# Altium PCB BAZ-NUMDISPLAY-01R03.PcbDoc (part 2 of 2)
Units mil, origin at the board's own origin, x right, y up, seen from the top; angles counter-clockwise.
Board outline 16512.45 x 6376.95 mil, 2 copper layers (Top Layer, Bottom Layer); 219 components, 209 nets, 584 pads, 78 vias.
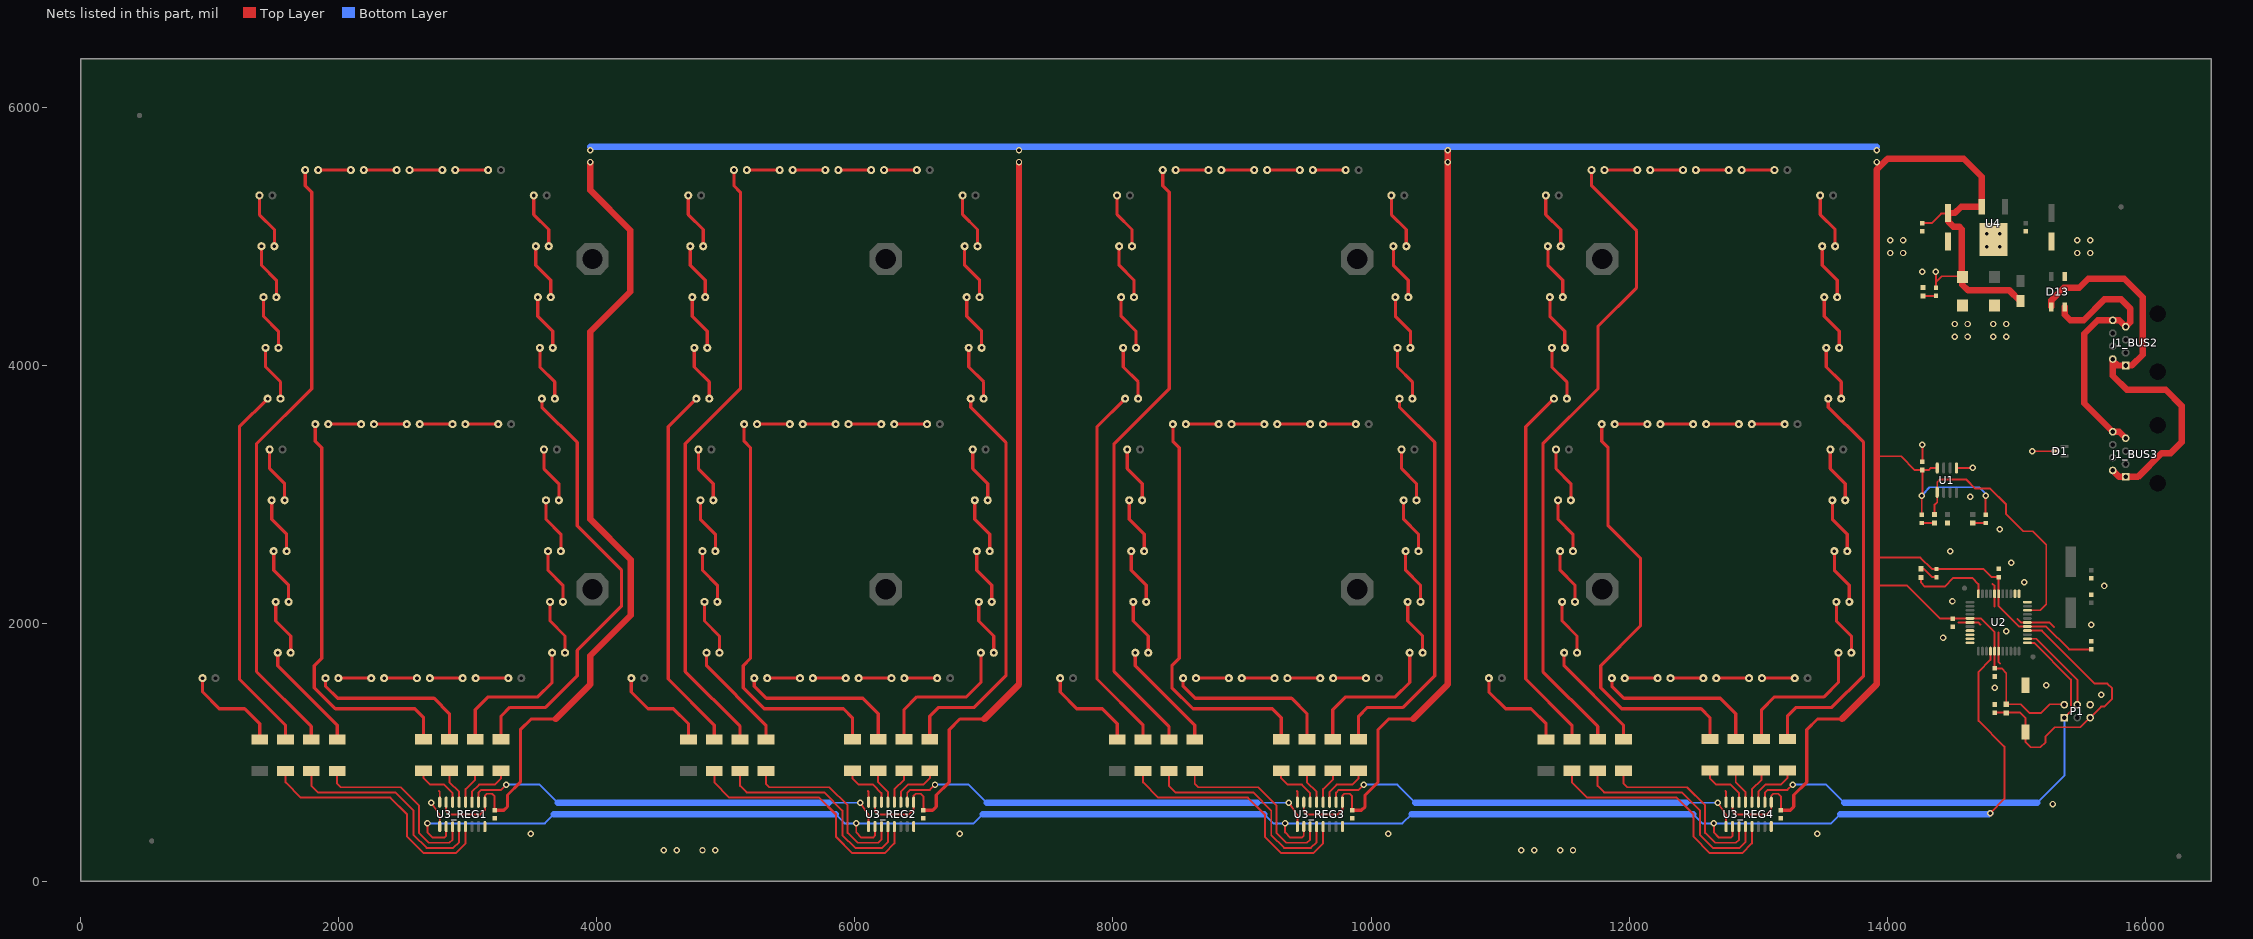
[diagram p2: the nets of this part, all layers, seen from the top]

## Via types
v1: diameter 50, hole 28, Top Layer to Bottom Layer, 76 vias
v2: diameter 50, hole 27.99, Top Layer to Bottom Layer, 2 vias

## Nets (pads, with @x,y where several pads share a name; then routed paths per layer and width w, separated by ;. In a path a pad name is that pad's centre, name@x,y a point inside that pad or via, vN(x,y) a via of type N, cw(c..) or ccw(c..) an arc to the next point about the centre after c; other vN are vias at no path point) (continued)
GND: C1.2 C2.2 C3.2 C4.2 C5.2 C6.2 C7.2 C8.2 C9_REG1.2 C9_REG2.2 C9_REG3.2 C9_REG4.2 C10.2 C11.2 C12.2 C13.2 D1.3 D13.3 D15.2 D16.2 P1.6 R1.2 R8.2 S1.2 U1.5 U2.6 U2.18 U2.28 U2.39 U3_REG1.8 U3_REG1.16 U3_REG2.8 U3_REG2.16 U3_REG3.8 U3_REG3.16 U3_REG4.8 U3_REG4.16 U4.4 | length 1703.3
  Top Layer w10: v1(15122.45,3335) D1.3@15304.18,3335
  Top Layer w15: 2779.32,700 2783.32,696 U3_REG1.8@2783.32,614.49 ; 6102.03,700 6106.03,696 U3_REG2.8@6106.03,614.49 ; 9424.74,700 9428.74,696 U3_REG3.8@9428.74,614.49 ; 12747.45,700 12751.45,696 U3_REG4.8@12751.45,614.49 ; C1.2@14272.45,3251.5 v1(14272.45,3385) ; U1.5@14537.45,3204.49 v1@14662.45,3204.49 ; 14552.45,2007.05 14705.4,2007.05 14722.45,1990 ; 14817.45,2305 14831.65,2290.8 14831.65,2129.2 ; 14863.55,1930 14863.55,1698.9 14872.45,1690 ; 15007.45,2035 15035.4,2007.05 15255.4,2007.05 15292.45,1970
  other v1: 4519.58,242 4619.58,242 4819.58,242 4919.58,242 11165,242 11265,242 11465,242 11565,242 3489.32,370 6812.03,370 10134.74,370 13457.45,370 15282.45,600 15659.85,1447.56 14832.45,1500 15232.45,1520 14432.45,1890 15582.45,1990 14505.45,2171 15682.45,2290 15062.45,2320 14962.45,2470 14488.19,2558.06 14872.45,2730 14642.45,2980 14662.45,3205 14522.45,4220 14622.45,4220 14822.45,4220 14922.45,4220 14522.45,4320 14622.45,4320 14822.45,4320 14922.45,4320 14272.45,4725 14022.45,4870 14122.45,4870 15472.45,4870 15572.45,4870 14772.45,4920 14872.45,4920 14022.45,4970 14122.45,4970 15472.45,4970 15572.45,4970 14772.45,5020 14872.45,5020
  other v2: 14921.73,1939.94
IND: R5.1 U2.22 | length 620.8
  Top Layer w15: R5.1@14262.45,2356.54 14262.45,2315 14292.45,2285 14445.45,2285 14513.45,2353 14657.45,2353 14706.07,2304.38 U2.22@14706.07,2229.49
INPUT: P1.1 U2.1 U3_REG4.2 | length 3785.5
  Top Layer w15: U3_REG4.2@13051.45,614.49 13051.45,688.43 13073.02,710 13226.45,710 v1(13266.45,750) ; U2.1@15085.99,1849.57 15137.88,1849.57 15422.45,1565 15422.45,1320 P1.1@15372.45,1270
  Bottom Layer w15: v1(13266.45,750) 13526.45,750 13666.45,610 ; 15162.45,610 15372.45,820 P1.1@15372.45,1270
  Bottom Layer w50: 13666.45,610 15162.45,610
MISO: P1.4 U2.2 | length 715.4
  Top Layer w15: U2.2@15085.99,1881.06 15156.38,1881.06 15474.02,1563.43 P1.4@15474.02,1367.64
NetD2_1: D2.1 R2.1 | length 98
  Top Layer w15: D2.1@14269.42,2776.54 R2.1@14367.45,2776.54
NetD3_1: D3.1 R3.1 | length 98
  Top Layer w15: R3.1@14662.45,2776.54 D3.1@14760.48,2776.54
NetD4_1: D4.1 R5.2 | length 146.9
  Top Layer w15: R5.2@14262.45,2423.46 14283.98,2423.46 14348.94,2358.5 D4.1@14382.45,2358.5
NetD6_7SEG1_K: D6_7SEG1.K R6_7SEG1.1 | length 775.5
  Top Layer w25: D6_7SEG1.K@945.46,1575.91 945.46,1468.1 1074.56,1339 1271.32,1339 1388.44,1221.88 R6_7SEG1.1@1388.44,1099.16
NetD6_7SEG2_K: D6_7SEG2.K R6_7SEG2.1 | length 775.5
  Top Layer w25: D6_7SEG2.K@4268.17,1575.91 4268.17,1468.1 4397.26,1339 4594.03,1339 4711.15,1221.88 R6_7SEG2.1@4711.15,1099.16
NetD6_7SEG3_K: D6_7SEG3.K R6_7SEG3.1 | length 775.5
  Top Layer w25: D6_7SEG3.K@7590.88,1575.91 7590.88,1468.1 7719.97,1339 7916.74,1339 8033.86,1221.88 R6_7SEG3.1@8033.86,1099.16
NetD6_7SEG4_K: D6_7SEG4.K R6_7SEG4.1 | length 775.5
  Top Layer w25: D6_7SEG4.K@10913.58,1575.91 10913.58,1468.1 11042.68,1339 11239.45,1339 11356.56,1221.88 R6_7SEG4.1@11356.56,1099.16
NetD7_L1_K: D7_L1.K D8_L1.A | length 254.4
  Top Layer w25: D8_L1.A@3061.21,1575.91 D7_L1.K@3315.6,1575.91
NetD7_L2_K: D7_L2.K D8_L2.A | length 441.6
  Top Layer w25: D7_L2.K@3591,3347.56 3591,3199.32 3706.75,3083.58 D8_L2.A@3706.75,2953.86
NetD7_L3_K: D7_L3.K D8_L3.A | length 441.6
  Top Layer w25: D7_L3.K@1465.15,3347.56 1465.15,3199.32 1580.89,3083.58 D8_L3.A@1580.89,2953.86
NetD7_L4_K: D7_L4.K D8_L4.A | length 254.4
  Top Layer w25: D8_L4.A@2982.41,3544.41 D7_L4.K@3236.86,3544.41
NetD7_L5_K: D7_L5.K D8_L5.A | length 441.6
  Top Layer w25: D7_L5.K@1386.41,5316.06 1386.41,5167.83 1502.15,5052.08 D8_L5.A@1502.15,4922.36
NetD7_L6_K: D7_L6.K D8_L6.A | length 441.6
  Top Layer w25: D7_L6.K@3512.26,5316.06 3512.26,5167.83 3628.01,5052.08 D8_L6.A@3628.01,4922.36
NetD7_L7_K: D7_L7.K D8_L7.A | length 254.4
  Top Layer w25: D8_L7.A@2903.73,5512.91 D7_L7.K@3158.12,5512.91
NetD7_L8_K: D7_L8.K D8_L8.A | length 254.4
  Top Layer w25: D8_L8.A@6383.92,1575.91 D7_L8.K@6638.31,1575.91
NetD7_L9_K: D7_L9.K D8_L9.A | length 441.6
  Top Layer w25: D7_L9.K@6913.71,3347.56 6913.71,3199.32 7029.46,3083.58 D8_L9.A@7029.46,2953.86
NetD7_L10_K: D7_L10.K D8_L10.A | length 441.6
  Top Layer w25: D7_L10.K@4787.85,3347.56 4787.85,3199.32 4903.6,3083.58 D8_L10.A@4903.6,2953.86
NetD7_L11_K: D7_L11.K D8_L11.A | length 254.4
  Top Layer w25: D8_L11.A@6305.11,3544.41 D7_L11.K@6559.57,3544.41
NetD7_L12_K: D7_L12.K D8_L12.A | length 441.6
  Top Layer w25: D7_L12.K@4709.11,5316.06 4709.11,5167.83 4824.86,5052.08 D8_L12.A@4824.86,4922.36
NetD7_L13_K: D7_L13.K D8_L13.A | length 441.6
  Top Layer w25: D7_L13.K@6834.97,5316.06 6834.97,5167.83 6950.72,5052.08 D8_L13.A@6950.72,4922.36
NetD7_L14_K: D7_L14.K D8_L14.A | length 254.4
  Top Layer w25: D8_L14.A@6226.44,5512.91 D7_L14.K@6480.83,5512.91
NetD7_L15_K: D7_L15.K D8_L15.A | length 254.4
  Top Layer w25: D8_L15.A@9706.62,1575.91 D7_L15.K@9961.02,1575.91
NetD7_L16_K: D7_L16.K D8_L16.A | length 441.6
  Top Layer w25: D7_L16.K@10236.42,3347.56 10236.42,3199.32 10352.16,3083.58 D8_L16.A@10352.16,2953.86
NetD7_L17_K: D7_L17.K D8_L17.A | length 441.6
  Top Layer w25: D7_L17.K@8110.56,3347.56 8110.56,3199.32 8226.31,3083.58 D8_L17.A@8226.31,2953.86
NetD7_L18_K: D7_L18.K D8_L18.A | length 254.4
  Top Layer w25: D8_L18.A@9627.82,3544.41 D7_L18.K@9882.28,3544.41
NetD7_L19_K: D7_L19.K D8_L19.A | length 441.6
  Top Layer w25: D7_L19.K@8031.82,5316.06 8031.82,5167.83 8147.57,5052.08 D8_L19.A@8147.57,4922.36
NetD7_L20_K: D7_L20.K D8_L20.A | length 441.6
  Top Layer w25: D7_L20.K@10157.68,5316.06 10157.68,5167.83 10273.42,5052.08 D8_L20.A@10273.42,4922.36
NetD7_L21_K: D7_L21.K D8_L21.A | length 254.4
  Top Layer w25: D8_L21.A@9549.14,5512.91 D7_L21.K@9803.54,5512.91
NetD7_L22_K: D7_L22.K D8_L22.A | length 254.4
  Top Layer w25: D8_L22.A@13029.33,1575.91 D7_L22.K@13283.73,1575.91
NetD7_L23_K: D7_L23.K D8_L23.A | length 441.6
  Top Layer w25: D7_L23.K@13559.12,3347.56 13559.12,3199.32 13674.87,3083.58 D8_L23.A@13674.87,2953.86
NetD7_L24_K: D7_L24.K D8_L24.A | length 441.6
  Top Layer w25: D7_L24.K@11433.27,3347.56 11433.27,3199.32 11549.02,3083.58 D8_L24.A@11549.08,2953.86
NetD7_L25_K: D7_L25.K D8_L25.A | length 254.4
  Top Layer w25: D8_L25.A@12950.59,3544.41 D7_L25.K@13204.99,3544.41
NetD7_L26_K: D7_L26.K D8_L26.A | length 441.6
  Top Layer w25: D7_L26.K@11354.53,5316.06 11354.53,5167.83 11470.28,5052.08 D8_L26.A@11470.28,4922.36
NetD7_L27_K: D7_L27.K D8_L27.A | length 441.6
  Top Layer w25: D7_L27.K@13480.38,5316.06 13480.38,5167.83 13596.13,5052.08 D8_L27.A@13596.13,4922.36
NetD7_L28_K: D7_L28.K D8_L28.A | length 254.4
  Top Layer w25: D8_L28.A@12871.85,5512.91 D7_L28.K@13126.25,5512.91
NetD8_L1_K: D8_L1.K D9_L1.A | length 254.4
  Top Layer w25: D9_L1.A@2706.81,1575.91 D8_L1.K@2961.21,1575.91
NetD8_L2_K: D8_L2.K D9_L2.A | length 441.6
  Top Layer w25: D8_L2.K@3606.75,2953.86 3606.75,2805.62 3722.5,2689.88 D9_L2.A@3722.43,2560.16
NetD8_L3_K: D8_L3.K D9_L3.A | length 441.6
  Top Layer w25: D8_L3.K@1480.89,2953.86 1480.89,2805.62 1596.64,2689.88 D9_L3.A@1596.64,2560.16
NetD8_L4_K: D8_L4.K D9_L4.A | length 254.4
  Top Layer w25: D9_L4.A@2628.07,3544.41 D8_L4.K@2882.41,3544.41
NetD8_L5_K: D8_L5.K D9_L5.A | length 441.6
  Top Layer w25: D8_L5.K@1402.15,4922.36 1402.15,4774.13 1517.9,4658.38 D9_L5.A@1517.9,4528.66
NetD8_L6_K: D8_L6.K D9_L6.A | length 441.6
  Top Layer w25: D8_L6.K@3528.01,4922.36 3528.01,4774.13 3643.76,4658.38 D9_L6.A@3643.76,4528.66
NetD8_L7_K: D8_L7.K D9_L7.A | length 254.4
  Top Layer w25: D9_L7.A@2549.33,5512.91 D8_L7.K@2803.73,5512.91
NetD8_L8_K: D8_L8.K D9_L8.A | length 254.4
  Top Layer w25: D9_L8.A@6029.52,1575.91 D8_L8.K@6283.92,1575.91
NetD8_L9_K: D8_L9.K D9_L9.A | length 441.6
  Top Layer w25: D8_L9.K@6929.46,2953.86 6929.46,2805.62 7045.2,2689.88 D9_L9.A@7045.2,2560.16
NetD8_L10_K: D8_L10.K D9_L10.A | length 441.6
  Top Layer w25: D8_L10.K@4803.6,2953.86 4803.6,2805.62 4919.35,2689.88 D9_L10.A@4919.35,2560.16
NetD8_L11_K: D8_L11.K D9_L11.A | length 254.4
  Top Layer w25: D9_L11.A@5950.78,3544.41 D8_L11.K@6205.11,3544.41
NetD8_L12_K: D8_L12.K D9_L12.A | length 441.6
  Top Layer w25: D8_L12.K@4724.86,4922.36 4724.86,4774.13 4840.61,4658.38 D9_L12.A@4840.61,4528.66
NetD8_L13_K: D8_L13.K D9_L13.A | length 441.6
  Top Layer w25: D8_L13.K@6850.72,4922.36 6850.72,4774.13 6966.46,4658.38 D9_L13.A@6966.4,4528.66
NetD8_L14_K: D8_L14.K D9_L14.A | length 254.4
  Top Layer w25: D9_L14.A@5872.04,5512.91 D8_L14.K@6126.44,5512.91
NetD8_L15_K: D8_L15.K D9_L15.A | length 254.4
  Top Layer w25: D9_L15.A@9352.29,1575.91 D8_L15.K@9606.62,1575.91
NetD8_L16_K: D8_L16.K D9_L16.A | length 441.6
  Top Layer w25: D8_L16.K@10252.16,2953.86 10252.16,2805.62 10367.91,2689.88 D9_L16.A@10367.91,2560.16
NetD8_L17_K: D8_L17.K D9_L17.A | length 441.6
  Top Layer w25: D8_L17.K@8126.31,2953.86 8126.31,2805.62 8242.06,2689.88 D9_L17.A@8242.06,2560.16
NetD8_L18_K: D8_L18.K D9_L18.A | length 254.4
  Top Layer w25: D9_L18.A@9273.49,3544.41 D8_L18.K@9527.82,3544.41
NetD8_L19_K: D8_L19.K D9_L19.A | length 441.6
  Top Layer w25: D8_L19.K@8047.57,4922.36 8047.57,4774.13 8163.32,4658.38 D9_L19.A@8163.32,4528.66
NetD8_L20_K: D8_L20.K D9_L20.A | length 441.6
  Top Layer w25: D8_L20.K@10173.42,4922.36 10173.42,4774.13 10289.17,4658.38 D9_L20.A@10289.11,4528.66
NetD8_L21_K: D8_L21.K D9_L21.A | length 254.4
  Top Layer w25: D9_L21.A@9194.75,5512.91 D8_L21.K@9449.14,5512.91
NetD8_L22_K: D8_L22.K D9_L22.A | length 254.4
  Top Layer w25: D9_L22.A@12674.94,1575.91 D8_L22.K@12929.33,1575.91
NetD8_L23_K: D8_L23.K D9_L23.A | length 441.6
  Top Layer w25: D8_L23.K@13574.87,2953.86 13574.87,2805.62 13690.62,2689.88 D9_L23.A@13690.62,2560.16
NetD8_L24_K: D8_L24.K D9_L24.A | length 441.6
  Top Layer w25: D8_L24.K@11449.08,2953.86 11449.02,2805.62 11564.77,2689.88 D9_L24.A@11564.77,2560.16
NetD8_L25_K: D8_L25.K D9_L25.A | length 254.4
  Top Layer w25: D9_L25.A@12596.26,3544.41 D8_L25.K@12850.59,3544.41
NetD8_L26_K: D8_L26.K D9_L26.A | length 441.6
  Top Layer w25: D8_L26.K@11370.28,4922.36 11370.28,4774.13 11486.03,4658.38 D9_L26.A@11486.03,4528.66
NetD8_L27_K: D8_L27.K D9_L27.A | length 441.6
  Top Layer w25: D8_L27.K@13496.13,4922.36 13496.13,4774.13 13611.88,4658.38 D9_L27.A@13611.82,4528.66
NetD8_L28_K: D8_L28.K D9_L28.A | length 254.4
  Top Layer w25: D9_L28.A@12517.46,5512.91 D8_L28.K@12771.85,5512.91
NetD9_L1_K: D9_L1.K D10_L1.A | length 254.4
  Top Layer w25: D10_L1.A@2352.55,1575.91 D9_L1.K@2606.94,1575.91
NetD9_L2_K: D9_L2.K D10_L2.A | length 441.6
  Top Layer w25: D9_L2.K@3622.43,2560.16 3622.43,2411.92 3738.18,2296.18 D10_L2.A@3738.18,2166.46
NetD9_L3_K: D9_L3.K D10_L3.A | length 441.6
  Top Layer w25: D9_L3.K@1496.58,2560.16 1496.58,2411.92 1612.33,2296.18 D10_L3.A@1612.39,2166.46
NetD9_L4_K: D9_L4.K D10_L4.A | length 254.4
  Top Layer w25: D10_L4.A@2273.81,3544.41 D9_L4.K@2528.2,3544.41
NetD9_L5_K: D9_L5.K D10_L5.A | length 441.6
  Top Layer w25: D9_L5.K@1417.84,4528.66 1417.84,4380.43 1533.59,4264.68 D10_L5.A@1533.59,4134.96
NetD9_L6_K: D9_L6.K D10_L6.A | length 441.6
  Top Layer w25: D9_L6.K@3543.69,4528.66 3543.69,4380.43 3659.44,4264.68 D10_L6.A@3659.44,4134.96
NetD9_L7_K: D9_L7.K D10_L7.A | length 254.4
  Top Layer w25: D10_L7.A@2195,5512.91 D9_L7.K@2449.46,5512.91
NetD9_L8_K: D9_L8.K D10_L8.A | length 254.4
  Top Layer w25: D10_L8.A@5675.25,1575.91 D9_L8.K@5929.65,1575.91
NetD9_L9_K: D9_L9.K D10_L9.A | length 441.6
  Top Layer w25: D9_L9.K@6945.14,2560.16 6945.14,2411.92 7060.89,2296.18 D10_L9.A@7060.89,2166.46
NetD9_L10_K: D9_L10.K D10_L10.A | length 441.6
  Top Layer w25: D9_L10.K@4819.29,2560.16 4819.29,2411.92 4935.04,2296.18 D10_L10.A@4935.1,2166.46
NetD9_L11_K: D9_L11.K D10_L11.A | length 254.4
  Top Layer w25: D10_L11.A@5596.51,3544.41 D9_L11.K@5850.91,3544.41
NetD9_L12_K: D9_L12.K D10_L12.A | length 441.6
  Top Layer w25: D9_L12.K@4740.55,4528.66 4740.55,4380.43 4856.3,4264.68 D10_L12.A@4856.3,4134.96
NetD9_L13_K: D9_L13.K D10_L13.A | length 441.6
  Top Layer w25: D9_L13.K@6866.4,4528.66 6866.4,4380.43 6982.15,4264.68 D10_L13.A@6982.15,4134.96
NetD9_L14_K: D9_L14.K D10_L14.A | length 254.4
  Top Layer w25: D10_L14.A@5517.71,5512.91 D9_L14.K@5772.17,5512.91
NetD9_L15_K: D9_L15.K D10_L15.A | length 254.4
  Top Layer w25: D10_L15.A@8997.96,1575.91 D9_L15.K@9252.36,1575.91
NetD9_L16_K: D9_L16.K D10_L16.A | length 441.6
  Top Layer w25: D9_L16.K@10267.85,2560.16 10267.85,2411.92 10383.6,2296.18 D10_L16.A@10383.66,2166.46
NetD9_L17_K: D9_L17.K D10_L17.A | length 441.6
  Top Layer w25: D9_L17.K@8142,2560.16 8142,2411.92 8257.74,2296.18 D10_L17.A@8257.74,2166.46
NetD9_L18_K: D9_L18.K D10_L18.A | length 254.4
  Top Layer w25: D10_L18.A@8919.22,3544.41 D9_L18.K@9173.62,3544.41
NetD9_L19_K: D9_L19.K D10_L19.A | length 441.6
  Top Layer w25: D9_L19.K@8063.26,4528.66 8063.26,4380.43 8179,4264.68 D10_L19.A@8179.07,4134.96
NetD9_L20_K: D9_L20.K D10_L20.A | length 441.6
  Top Layer w25: D9_L20.K@10189.11,4528.66 10189.11,4380.43 10304.86,4264.68 D10_L20.A@10304.86,4134.96
NetD9_L21_K: D9_L21.K D10_L21.A | length 254.4
  Top Layer w25: D10_L21.A@8840.42,5512.91 D9_L21.K@9094.88,5512.91
NetD9_L22_K: D9_L22.K D10_L22.A | length 254.4
  Top Layer w25: D10_L22.A@12320.67,1575.91 D9_L22.K@12575,1575.91
NetD9_L23_K: D9_L23.K D10_L23.A | length 441.6
  Top Layer w25: D9_L23.K@13590.56,2560.16 13590.56,2411.92 13706.31,2296.18 D10_L23.A@13706.37,2166.46
NetD9_L24_K: D9_L24.K D10_L24.A | length 441.6
  Top Layer w25: D9_L24.K@11464.77,2560.16 11464.7,2411.92 11580.45,2296.18 D10_L24.A@11580.45,2166.46
NetD9_L25_K: D9_L25.K D10_L25.A | length 254.4
  Top Layer w25: D10_L25.A@12241.93,3544.41 D9_L25.K@12496.32,3544.41
NetD9_L26_K: D9_L26.K D10_L26.A | length 441.6
  Top Layer w25: D9_L26.K@11385.96,4528.66 11385.96,4380.43 11501.71,4264.68 D10_L26.A@11501.71,4134.96
NetD9_L27_K: D9_L27.K D10_L27.A | length 441.6
  Top Layer w25: D9_L27.K@13511.82,4528.66 13511.82,4380.43 13627.57,4264.68 D10_L27.A@13627.57,4134.96
NetD9_L28_K: D9_L28.K D10_L28.A | length 254.4
  Top Layer w25: D10_L28.A@12163.19,5512.91 D9_L28.K@12417.58,5512.91
NetD10_L1_K: D10_L1.K D11_L1.A | length 254.4
  Top Layer w25: D11_L1.A@1998.15,1575.91 D10_L1.K@2252.55,1575.91
NetD10_L2_K: D10_L2.K D11_L2.A | length 441.6
  Top Layer w25: D10_L2.K@3638.24,2166.46 3638.24,2018.22 3753.99,1902.47 D11_L2.A@3753.99,1772.76
NetD10_L3_K: D10_L3.K D11_L3.A | length 441.6
  Top Layer w25: D10_L3.K@1512.39,2166.46 1512.39,2018.22 1628.14,1902.47 D11_L3.A@1628.14,1772.76
NetD10_L4_K: D10_L4.K D11_L4.A | length 254.4
  Top Layer w25: D11_L4.A@1919.41,3544.41 D10_L4.K@2173.81,3544.41
NetD10_L5_K: D10_L5.K D11_L5.A | length 441.6
  Top Layer w25: D10_L5.K@1433.65,4134.96 1433.65,3986.73 1549.4,3870.98 D11_L5.A@1549.4,3741.26
NetD10_L6_K: D10_L6.K D11_L6.A | length 441.6
  Top Layer w25: D10_L6.K@3559.5,4134.96 3559.5,3986.73 3675.25,3870.98 D11_L6.A@3675.25,3741.26
NetD10_L7_K: D10_L7.K D11_L7.A | length 254.4
  Top Layer w25: D11_L7.A@1840.67,5512.91 D10_L7.K@2095,5512.91
NetD10_L8_K: D10_L8.K D11_L8.A | length 254.4
  Top Layer w25: D11_L8.A@5320.86,1575.91 D10_L8.K@5575.25,1575.91
NetD10_L9_K: D10_L9.K D11_L9.A | length 441.6
  Top Layer w25: D10_L9.K@6960.95,2166.46 6960.95,2018.22 7076.7,1902.47 D11_L9.A@7076.7,1772.76
NetD10_L10_K: D10_L10.K D11_L10.A | length 441.6
  Top Layer w25: D10_L10.K@4835.1,2166.46 4835.1,2018.22 4950.85,1902.47 D11_L10.A@4950.85,1772.76
NetD10_L11_K: D10_L11.K D11_L11.A | length 254.4
  Top Layer w25: D11_L11.A@5242.12,3544.41 D10_L11.K@5496.51,3544.41
NetD10_L12_K: D10_L12.K D11_L12.A | length 441.6
  Top Layer w25: D10_L12.K@4756.36,4134.96 4756.36,3986.73 4872.11,3870.98 D11_L12.A@4872.11,3741.26
NetD10_L13_K: D10_L13.K D11_L13.A | length 441.6
  Top Layer w25: D10_L13.K@6882.21,4134.96 6882.21,3986.73 6997.96,3870.98 D11_L13.A@6997.96,3741.26
NetD10_L14_K: D10_L14.K D11_L14.A | length 254.4
  Top Layer w25: D11_L14.A@5163.38,5512.91 D10_L14.K@5417.71,5512.91
NetD10_L15_K: D10_L15.K D11_L15.A | length 254.4
  Top Layer w25: D11_L15.A@8643.57,1575.91 D10_L15.K@8897.96,1575.91
NetD10_L16_K: D10_L16.K D11_L16.A | length 441.6
  Top Layer w25: D10_L16.K@10283.66,2166.46 10283.66,2018.22 10399.41,1902.47 D11_L16.A@10399.41,1772.76
NetD10_L17_K: D10_L17.K D11_L17.A | length 441.6
  Top Layer w25: D10_L17.K@8157.81,2166.46 8157.81,2018.22 8273.55,1902.47 D11_L17.A@8273.55,1772.76
NetD10_L18_K: D10_L18.K D11_L18.A | length 254.4
  Top Layer w25: D11_L18.A@8564.83,3544.41 D10_L18.K@8819.22,3544.41
NetD10_L19_K: D10_L19.K D11_L19.A | length 441.6
  Top Layer w25: D10_L19.K@8079.07,4134.96 8079.07,3986.73 8194.81,3870.98 D11_L19.A@8194.81,3741.26
NetD10_L20_K: D10_L20.K D11_L20.A | length 441.6
  Top Layer w25: D10_L20.K@10204.92,4134.96 10204.92,3986.73 10320.67,3870.98 D11_L20.A@10320.61,3741.26
NetD10_L21_K: D10_L21.K D11_L21.A | length 254.4
  Top Layer w25: D11_L21.A@8486.09,5512.91 D10_L21.K@8740.42,5512.91
NetD10_L22_K: D10_L22.K D11_L22.A | length 254.4
  Top Layer w25: D11_L22.A@11966.28,1575.91 D10_L22.K@12220.67,1575.91
NetD10_L23_K: D10_L23.K D11_L23.A | length 441.6
  Top Layer w25: D10_L23.K@13606.37,2166.46 13606.37,2018.22 13722.12,1902.47 D11_L23.A@13722.12,1772.76
NetD10_L24_K: D10_L24.K D11_L24.A | length 441.6
  Top Layer w25: D10_L24.K@11480.51,2166.46 11480.51,2018.22 11596.26,1902.47 D11_L24.A@11596.26,1772.76
NetD10_L25_K: D10_L25.K D11_L25.A | length 254.4
  Top Layer w25: D11_L25.A@11887.54,3544.41 D10_L25.K@12141.93,3544.41
NetD10_L26_K: D10_L26.K D11_L26.A | length 441.6
  Top Layer w25: D10_L26.K@11401.77,4134.96 11401.77,3986.73 11517.52,3870.98 D11_L26.A@11517.52,3741.26
NetD10_L27_K: D10_L27.K D11_L27.A | length 441.6
  Top Layer w25: D10_L27.K@13527.63,4134.96 13527.63,3986.73 13643.38,3870.98 D11_L27.A@13643.31,3741.26
NetD10_L28_K: D10_L28.K D11_L28.A | length 254.4
  Top Layer w25: D11_L28.A@11808.8,5512.91 D10_L28.K@12063.19,5512.91
NetD11_L1_K: D11_L1.K R7_L1.1 | length 1309.4
  Top Layer w25: D11_L1.K@1898.15,1575.91 1898.15,1512.69 1991.85,1419 2739.32,1419 2858.32,1300 R7_L1.1@2858.32,1102.05
NetD11_L2_K: D11_L2.K R7_L2.1 | length 1142.4
  Top Layer w25: R7_L2.1@3058.32,1102.05 3058.32,1330 3158.32,1430 3542.32,1430 3653.99,1541.67 D11_L2.K@3653.99,1772.76
NetD11_L3_K: D11_L3.K R7_L3.1 | length 861.3
  Top Layer w25: D11_L3.K@1528.14,1772.76 1528.14,1672.19 1988.44,1211.88 R7_L3.1@1988.44,1102.12
NetD11_L4_K: D11_L4.K R7_L4.1 | length 3197
  Top Layer w25: D11_L4.K@1819.41,3544.41 1819.41,3411.43 1868.85,3362 1868.85,1730 1811.85,1673 1811.85,1502 1974.85,1339 2589.32,1339 2658.32,1270 R7_L4.1@2658.32,1102.05
NetD11_L5_K: D11_L5.K R7_L5.1 | length 2877.4
  Top Layer w25: D11_L5.K@1449.4,3741.26 1231.32,3523.19 1231.32,1569 1588.44,1211.88 R7_L5.1@1588.44,1102.12
NetD11_L6_K: D11_L6.K R7_L6.1 | length 3442.3
  Top Layer w25: R7_L6.1@3258.32,1102.05 3258.32,1280 3327.32,1349 3603.32,1349 3848.32,1594 3848.32,1790.32 4191,2133 4191,2414 3848.32,2756.68 3848.32,3402 3575.19,3675.13 D11_L6.K@3575.19,3741.26
NetD11_L7_K: D11_L7.K R7_L7.1 | length 4784.6
  Top Layer w25: D11_L7.K@1740.67,5512.91 1740.67,5390.17 1790.85,5340 1790.85,3818.52 1363.56,3391.23 1363.56,1626.77 1788.44,1201.88 R7_L7.1@1788.44,1102.12
NetD11_L8_K: D11_L8.K R7_L8.1 | length 1309.4
  Top Layer w25: D11_L8.K@5220.86,1575.91 5220.86,1512.69 5314.55,1419 6062.03,1419 6181.03,1300 R7_L8.1@6181.03,1102.05
NetD11_L9_K: D11_L9.K R7_L9.1 | length 1142.4
  Top Layer w25: R7_L9.1@6381.03,1102.05 6381.03,1330 6481.03,1430 6865.03,1430 6976.7,1541.67 D11_L9.K@6976.7,1772.76
NetD11_L10_K: D11_L10.K R7_L10.1 | length 861.3
  Top Layer w25: D11_L10.K@4850.85,1772.76 4850.85,1672.19 5311.15,1211.88 R7_L10.1@5311.15,1102.12
NetD11_L11_K: D11_L11.K R7_L11.1 | length 3197
  Top Layer w25: D11_L11.K@5142.12,3544.41 5142.12,3411.43 5191.55,3362 5191.55,1730 5134.55,1673 5134.55,1502 5297.55,1339 5912.03,1339 5981.03,1270 R7_L11.1@5981.03,1102.05
NetD11_L12_K: D11_L12.K R7_L12.1 | length 2877.4
  Top Layer w25: D11_L12.K@4772.11,3741.26 4554.03,3523.19 4554.03,1569 4911.15,1211.88 R7_L12.1@4911.15,1102.12
NetD11_L13_K: D11_L13.K R7_L13.1 | length 3158.4
  Top Layer w25: R7_L13.1@6581.03,1102.05 6581.03,1280 6650.03,1349 6926.03,1349 7171.03,1594 7171.03,3402 6897.9,3675.13 D11_L13.K@6897.9,3741.26
NetD11_L14_K: D11_L14.K R7_L14.1 | length 4784.6
  Top Layer w25: D11_L14.K@5063.38,5512.91 5063.38,5390.17 5113.55,5340 5113.55,3818.52 4686.26,3391.23 4686.26,1626.77 5111.15,1201.88 R7_L14.1@5111.15,1102.12
NetD11_L15_K: D11_L15.K R7_L15.1 | length 1309.4
  Top Layer w25: D11_L15.K@8543.57,1575.91 8543.57,1512.69 8637.26,1419 9384.74,1419 9503.74,1300 R7_L15.1@9503.74,1102.05
NetD11_L16_K: D11_L16.K R7_L16.1 | length 1142.4
  Top Layer w25: R7_L16.1@9703.74,1102.05 9703.74,1330 9803.74,1430 10187.74,1430 10299.41,1541.67 D11_L16.K@10299.41,1772.76
NetD11_L17_K: D11_L17.K R7_L17.1 | length 861.3
  Top Layer w25: D11_L17.K@8173.55,1772.76 8173.55,1672.19 8633.86,1211.88 R7_L17.1@8633.86,1102.12
NetD11_L18_K: D11_L18.K R7_L18.1 | length 3197
  Top Layer w25: D11_L18.K@8464.83,3544.41 8464.83,3411.43 8514.26,3362 8514.26,1730 8457.26,1673 8457.26,1502 8620.26,1339 9234.74,1339 9303.74,1270 R7_L18.1@9303.74,1102.05
NetD11_L19_K: D11_L19.K R7_L19.1 | length 2877.4
  Top Layer w25: D11_L19.K@8094.81,3741.26 7876.74,3523.19 7876.74,1569 8233.86,1211.88 R7_L19.1@8233.86,1102.12
NetD11_L20_K: D11_L20.K R7_L20.1 | length 3158.4
  Top Layer w25: R7_L20.1@9903.74,1102.05 9903.74,1280 9972.74,1349 10248.74,1349 10493.74,1594 10493.74,3402 10220.61,3675.13 D11_L20.K@10220.61,3741.26
NetD11_L21_K: D11_L21.K R7_L21.1 | length 4784.6
  Top Layer w25: D11_L21.K@8386.09,5512.91 8386.09,5390.17 8436.26,5340 8436.26,3818.52 8008.97,3391.23 8008.97,1626.77 8433.86,1201.88 R7_L21.1@8433.86,1102.12
NetD11_L22_K: D11_L22.K R7_L22.1 | length 1309.4
  Top Layer w25: D11_L22.K@11866.28,1575.91 11866.28,1512.69 11959.97,1419 12707.45,1419 12826.45,1300 R7_L22.1@12826.45,1102.05
NetD11_L23_K: D11_L23.K R7_L23.1 | length 1142.4
  Top Layer w25: R7_L23.1@13026.45,1102.05 13026.45,1330 13126.45,1430 13510.45,1430 13622.12,1541.67 D11_L23.K@13622.12,1772.76
NetD11_L24_K: D11_L24.K R7_L24.1 | length 861.3
  Top Layer w25: D11_L24.K@11496.26,1772.76 11496.26,1672.19 11956.56,1211.88 R7_L24.1@11956.56,1102.12
NetD11_L25_K: D11_L25.K R7_L25.1 | length 3405
  Top Layer w25: D11_L25.K@11787.54,3544.41 11787.54,3411.43 11836.97,3362 11836.97,2756.03 12088,2505 12088,1981.03 11779.97,1673 11779.97,1502 11942.97,1339 12557.45,1339 12626.45,1270 R7_L25.1@12626.45,1102.05
NetD11_L26_K: D11_L26.K R7_L26.1 | length 2877.4
  Top Layer w25: D11_L26.K@11417.52,3741.26 11199.45,3523.19 11199.45,1569 11556.56,1211.88 R7_L26.1@11556.56,1102.12
NetD11_L27_K: D11_L27.K R7_L27.1 | length 3158.4
  Top Layer w25: R7_L27.1@13226.45,1102.05 13226.45,1280 13295.45,1349 13571.45,1349 13816.45,1594 13816.45,3402 13543.31,3675.13 D11_L27.K@13543.31,3741.26
NetD11_L28_K: D11_L28.K R7_L28.1 | length 5032.3
  Top Layer w25: D11_L28.K@11708.8,5512.91 11708.8,5390.17 12058,5040.97 12058,4602 11758.97,4302.97 11758.97,3818.52 11331.68,3391.23 11331.68,1626.77 11756.56,1201.88 R7_L28.1@11756.56,1102.12
NetD14_1: D14.1 R8.1 | length 98
  Top Layer w15: R8.1@14279.42,4538.5 D14.1@14377.45,4538.5
NetU3_REG1_2: U3_REG1.2 U3_REG2.9 | length 3309.7
  Top Layer w15: U3_REG1.2@3083.32,614.49 3083.32,688.43 3104.89,710 3258.32,710 v1(3298.32,750) ; v1(6041.03,610) 6106.03,515 U3_REG2.9@6106.03,425.51
  Bottom Layer w15: v1(3298.32,750) 3558.32,750 3698.32,610 ; 5807.03,610 v1(6041.03,610)
  Bottom Layer w50: 3698.32,610 5797.03,610
NetU3_REG2_2: U3_REG2.2 U3_REG3.9 | length 3309.7
  Top Layer w15: U3_REG2.2@6406.03,614.49 6406.03,688.43 6427.6,710 6581.03,710 v1(6621.03,750) ; v1(9363.74,610) 9428.74,515 U3_REG3.9@9428.74,425.51
  Bottom Layer w15: v1(6621.03,750) 6881.03,750 7021.03,610 ; 9129.74,610 v1(9363.74,610)
  Bottom Layer w50: 7021.03,610 9119.74,610
NetU3_REG3_2: U3_REG3.2 U3_REG4.9 | length 3309.7
  Top Layer w15: U3_REG3.2@9728.74,614.49 9728.74,688.43 9750.31,710 9903.74,710 v1(9943.74,750) ; v1(12686.45,610) 12751.45,515 U3_REG4.9@12751.45,425.51
  Bottom Layer w15: v1(9943.74,750) 10203.74,750 10343.74,610 ; 12452.45,610 v1(12686.45,610)
  Bottom Layer w50: 10343.74,610 12442.45,610
OUTPUT: U3_REG1.9 | length 204.6
  Top Layer w15: v1(2718.32,610) 2783.32,515 U3_REG1.9@2783.32,425.51
PIN_A: U2.30
PIN_B: U2.31
PIN_C: U2.32
PIN_D: U2.33
POWER_V+: D13.1 J1_BUS2.1 J1_BUS2.2 J1_BUS3.1 J1_BUS3.2 | length 3324.8
  Top Layer w50: D13.1@15269.89,4451.89 15269.89,4502.44 15367.45,4600 15487.45,4600 15557.45,4670 15837.45,4670 15980,4527.45 15980,4082.55 15895.83,3998.39 15784.06,3998.39 J1_BUS2.2@15747.49,4034.96 ; J1_BUS3.2@15747.45,3185 15797.45,3135 15942.45,3135 16127.45,3320 16197.45,3320 16282.45,3405 16282.45,3685 16157.45,3810 15857.45,3810 15747.49,3919.96 J1_BUS2.2@15747.49,4048.39
POWER_V-: D13.2 J1_BUS2.7 J1_BUS2.8 J1_BUS3.7 J1_BUS3.8 | length 2192.5
  Top Layer w50: D13.2@15375.01,4451.89 15375.01,4392.44 15417.45,4350 15522.45,4350 15682.45,4510 15812.45,4510 15882.45,4440 15882.45,4333.35 J1_BUS2.7@15847.49,4298.39 15797.49,4348.39 15630.83,4348.39 15527.45,4245 15527.45,3705.04 J1_BUS3.8@15747.45,3485 15797.45,3485 J1_BUS3.7@15844.95,3437.5 ; J1_BUS2.8@15747.49,4348.39 J1_BUS2.8@15750.87,4345
RCK: U2.37 U3_REG1.10 U3_REG2.10 U3_REG3.10 U3_REG4.10 | length 14970.4
  Top Layer w15: v1(2688.32,450) 2688.32,380 2728.32,340 2818.32,340 2833.32,355 U3_REG1.10@2833.32,425.51 ; v1(6011.03,450) 6011.03,380 6051.03,340 6141.03,340 6156.03,355 U3_REG2.10@6156.03,425.51 ; v1(9333.74,450) 9333.74,380 9373.74,340 9463.74,340 9478.74,355 U3_REG3.10@9478.74,425.51 ; v1(12656.45,450) 12656.45,380 12696.45,340 12786.45,340 12801.45,355 U3_REG4.10@12801.45,425.51 ; v1(14797.45,530) 14907.45,640 14907.45,1045 14707.45,1245 14707.45,1625 14800.16,1717.71 U2.37@14800.16,1784.21
  Bottom Layer w15: v1(2688.32,450) 3598.32,450 3668.32,520 ; 5851.03,520 5921.03,450 6921.03,450 6991.03,520 ; 9173.74,520 9243.74,450 10243.74,450 10313.74,520 ; 12496.45,520 12566.45,450 13566.45,450 13636.45,520
  Bottom Layer w50: 3668.32,520 5851.03,520 ; 6991.03,520 9173.74,520 ; 10313.74,520 12496.45,520 ; 13636.45,520 14787.45,520 v1(14797.45,530)
RO: R2.2 U1.1 U2.9 | length 1992.7
  Top Layer w15: R2.2@14367.45,2843.46 14367.45,2920 14387.45,2940 14387.45,3095 14407.45,3115 14612.45,3115 14682.45,3045 14797.45,3045 14921.2,2921.25 14921.2,2846.25 15053.7,2713.75 15128.7,2713.75 15232.45,2610 15232.45,2150 15183.98,2101.54 U2.9@15085.99,2101.54
RST: C2.1 P1.5 R4.1 S1.1 U2.4 | length 2240.6
  Top Layer w15: C2.1@14832.45,1308.5 15028.95,1308.5 15072.45,1265 S1.1@15072.45,1159.29 ; S1.1@15072.45,1165 15072.45,1080 15112.45,1040 15187.45,1040 15227.45,1080 15227.45,1125 15297.45,1195 15497.45,1195 15657.45,1355 15682.45,1355 15742.45,1415 15742.45,1497 15706.45,1533 15609.45,1533 15198.39,1944.06 U2.4@15085.99,1944.06
SEGA_7SEG1: R7_L7.2 U3_REG1.12 | length 1708.4
  Top Layer w15: R7_L7.2@1788.44,855.07 1788.44,740.24 1838.68,690 2440.32,690 2581.32,549 2581.32,360.12 2681.45,260 2888.32,260 2933.32,305 U3_REG1.12@2933.32,425.51
SEGA_7SEG2: R7_L14.2 U3_REG2.12 | length 1708.4
  Top Layer w15: R7_L14.2@5111.15,855.07 5111.15,740.24 5161.39,690 5763.03,690 5904.03,549 5904.03,360.12 6004.16,260 6211.03,260 6256.03,305 U3_REG2.12@6256.03,425.51
SEGA_7SEG3: R7_L21.2 U3_REG3.12 | length 1708.4
  Top Layer w15: R7_L21.2@8433.86,855.07 8433.86,740.24 8484.1,690 9085.74,690 9226.74,549 9226.74,360.12 9326.87,260 9533.74,260 9578.74,305 U3_REG3.12@9578.74,425.51
SEGA_7SEG4: R7_L28.2 U3_REG4.12 | length 1708.4
  Top Layer w15: R7_L28.2@11756.56,855.07 11756.56,740.24 11806.81,690 12408.45,690 12549.45,549 12549.45,360.12 12649.57,260 12856.45,260 12901.45,305 U3_REG4.12@12901.45,425.51
SEGB_7SEG1: R7_L5.2 U3_REG1.13 | length 1971.8
  Top Layer w15: R7_L5.2@1588.44,855.07 1588.44,767.12 1705.56,650 2400.32,650 2531.32,519 2531.32,347 2658.32,220 2908.32,220 2983.32,295 U3_REG1.13@2983.32,425.51
SEGB_7SEG2: R7_L12.2 U3_REG2.13 | length 1971.8
  Top Layer w15: R7_L12.2@4911.15,855.07 4911.15,767.12 5028.26,650 5723.03,650 5854.03,519 5854.03,347 5981.03,220 6231.03,220 6306.03,295 U3_REG2.13@6306.03,425.51
SEGB_7SEG3: R7_L19.2 U3_REG3.13 | length 1971.8
  Top Layer w15: R7_L19.2@8233.86,855.07 8233.86,767.12 8350.97,650 9045.74,650 9176.74,519 9176.74,347 9303.74,220 9553.74,220 9628.74,295 U3_REG3.13@9628.74,425.51
SEGB_7SEG4: R7_L26.2 U3_REG4.13 | length 1971.8
  Top Layer w15: R7_L26.2@11556.56,855.07 11556.56,767.12 11673.68,650 12368.45,650 12499.45,519 12499.45,347 12626.45,220 12876.45,220 12951.45,295 U3_REG4.13@12951.45,425.51
SEGC_7SEG1: R7_L6.2 U3_REG1.3 | length 407
  Top Layer w15: U3_REG1.3@3033.32,614.49 3033.32,695 3088.32,750 3208.32,750 3258.32,800 R7_L6.2@3258.32,857.95
SEGC_7SEG2: R7_L13.2 U3_REG2.3 | length 407
  Top Layer w15: U3_REG2.3@6356.03,614.49 6356.03,695 6411.03,750 6531.03,750 6581.03,800 R7_L13.2@6581.03,857.95
SEGC_7SEG3: R7_L20.2 U3_REG3.3 | length 407
  Top Layer w15: U3_REG3.3@9678.74,614.49 9678.74,695 9733.74,750 9853.74,750 9903.74,800 R7_L20.2@9903.74,857.95
SEGC_7SEG4: R7_L27.2 U3_REG4.3 | length 407
  Top Layer w15: U3_REG4.3@13001.45,614.49 13001.45,695 13056.45,750 13176.45,750 13226.45,800 R7_L27.2@13226.45,857.95
SEGD_7SEG1: R7_L4.2 U3_REG1.6 | length 401.1
  Top Layer w15: R7_L4.2@2658.32,857.95 2658.32,800 2708.32,750 2818.32,750 2883.32,685 U3_REG1.6@2883.32,614.49
SEGD_7SEG2: R7_L11.2 U3_REG2.6 | length 401.1
  Top Layer w15: R7_L11.2@5981.03,857.95 5981.03,800 6031.03,750 6141.03,750 6206.03,685 U3_REG2.6@6206.03,614.49
SEGD_7SEG3: R7_L18.2 U3_REG3.6 | length 401.1
  Top Layer w15: R7_L18.2@9303.74,857.95 9303.74,800 9353.74,750 9463.74,750 9528.74,685 U3_REG3.6@9528.74,614.49
SEGD_7SEG4: R7_L25.2 U3_REG4.6 | length 401.1
  Top Layer w15: R7_L25.2@12626.45,857.95 12626.45,800 12676.45,750 12786.45,750 12851.45,685 U3_REG4.6@12851.45,614.49
SEGE_7SEG1: R7_L3.2 U3_REG1.11 | length 1417.2
  Top Layer w15: R7_L3.2@1988.44,855.07 1988.44,757.12 2015.56,730 2480.32,730 2621.32,589 2621.32,377 2698.32,300 2858.32,300 2883.32,325 U3_REG1.11@2883.32,425.51
SEGE_7SEG2: R7_L10.2 U3_REG2.11 | length 1417.2
  Top Layer w15: R7_L10.2@5311.15,855.07 5311.15,757.12 5338.26,730 5803.03,730 5944.03,589 5944.03,377 6021.03,300 6181.03,300 6206.03,325 U3_REG2.11@6206.03,425.51
SEGE_7SEG3: R7_L17.2 U3_REG3.11 | length 1417.2
  Top Layer w15: R7_L17.2@8633.86,855.07 8633.86,757.12 8660.97,730 9125.74,730 9266.74,589 9266.74,377 9343.74,300 9503.74,300 9528.74,325 U3_REG3.11@9528.74,425.51
SEGE_7SEG4: R7_L24.2 U3_REG4.11 | length 1417.2
  Top Layer w15: R7_L24.2@11956.56,855.07 11956.56,757.12 11983.68,730 12448.45,730 12589.45,589 12589.45,377 12666.45,300 12826.45,300 12851.45,325 U3_REG4.11@12851.45,425.51
SEGF_7SEG1: R7_L2.2 U3_REG1.4 | length 274.5
  Top Layer w15: U3_REG1.4@2983.32,614.49 2983.32,715 3058.32,790 R7_L2.2@3058.32,857.95
SEGF_7SEG2: R7_L9.2 U3_REG2.4 | length 274.5
  Top Layer w15: U3_REG2.4@6306.03,614.49 6306.03,715 6381.03,790 R7_L9.2@6381.03,857.95
SEGF_7SEG3: R7_L16.2 U3_REG3.4 | length 274.5
  Top Layer w15: U3_REG3.4@9628.74,614.49 9628.74,715 9703.74,790 R7_L16.2@9703.74,857.95
SEGF_7SEG4: R7_L23.2 U3_REG4.4 | length 274.5
  Top Layer w15: U3_REG4.4@12951.45,614.49 12951.45,715 13026.45,790 R7_L23.2@13026.45,857.95
SEGG_7SEG1: R7_L1.2 U3_REG1.5 | length 274.5
  Top Layer w15: R7_L1.2@2858.32,857.95 2858.32,770 2933.32,695 U3_REG1.5@2933.32,614.49
SEGG_7SEG2: R7_L8.2 U3_REG2.5 | length 274.5
  Top Layer w15: R7_L8.2@6181.03,857.95 6181.03,770 6256.03,695 U3_REG2.5@6256.03,614.49
SEGG_7SEG3: R7_L15.2 U3_REG3.5 | length 274.5
  Top Layer w15: R7_L15.2@9503.74,857.96 9503.74,770 9578.74,695 U3_REG3.5@9578.74,614.49
SEGG_7SEG4: R7_L22.2 U3_REG4.5 | length 274.5
  Top Layer w15: R7_L22.2@12826.45,857.95 12826.45,770 12901.45,695 U3_REG4.5@12901.45,614.49
TCP_RESET: U2.13
USART1_RX: U2.11
USART1_TX: U2.12
VCC: C1.1 C4.1 C5.1 C6.1 C7.1 C9_REG1.1 C9_REG2.1 C9_REG3.1 C9_REG4.1 C11.1 C13.1 D2.2 D3.2 D4.2 D12.2 D14.2 D16.1 P1.2 R4.2 U1.8 U2.5 U2.17 U2.27 U2.38 U3_REG1.1 U3_REG1.7 U3_REG2.1 U3_REG2.7 U3_REG3.1 U3_REG3.7 U3_REG4.1 U3_REG4.7 U4.3 | length 44281.4
  Top Layer w15: U3_REG1.7@2833.32,614.49 2833.32,545 2858.32,520 3098.32,520 3133.32,555 3133.32,665 3148.32,680 3188.32,680 3208.32,660 C9_REG1.1@3208.32,551.5 ; U3_REG2.7@6156.03,614.49 6156.03,545 6181.03,520 6421.03,520 6456.03,555 6456.03,665 6471.03,680 6511.03,680 6531.03,660 C9_REG2.1@6531.03,551.5 ; U3_REG3.7@9478.74,614.49 9478.74,545 9503.74,520 9743.74,520 9778.74,555 9778.74,665 9793.74,680 9833.74,680 9853.74,660 C9_REG3.1@9853.74,551.5 ; U3_REG4.7@12801.45,614.49 12801.45,545 12826.45,520 13066.45,520 13101.45,555 13101.45,665 13116.45,680 13156.45,680 13176.45,660 C9_REG4.1@13176.45,551.5 ; 13917.45,2510 14257.45,2510 14345.95,2421.5 14744.95,2421.5 14806.45,2360 14863.55,2360 U2.17@14863.55,2229.49 ; 13917.45,3295 14107.45,3295 14213.94,3188.51 14321.47,3188.51 14337.45,3204.49 U1.8@14387.45,3204.49 ; 13922.45,2295 14152.45,2295 14410.32,2037.13 C4.1@14509.38,2037.13 ; D2.2@14267.45,2841.5 v1(14267.45,2990) ; v1@14272.45,2995 C1.1@14272.45,3188.51 ; C13.1@14272.45,5101.5 14343.94,5101.5 14417.45,5175 C11.1@14472.45,5175 ; D14.2@14377.45,4595 14377.45,4645 14422.45,4690 D16.1@14582.45,4690 ; D14.2@14377.45,4601.5 v1(14377.45,4725) ; C4.1@14509.38,2038.54 14723.9,2038.54 14832.45,1930 U2.38@14832.45,1784.61 ; D3.2@14762.45,2841.5 v1(14762.45,2990) ; C5.1@14832.05,1651.5 U2.38@14832.05,1784.61 ; C5.1@14832.45,1651.5 14885.95,1651.5 14922.45,1615 R4.2@14922.45,1373.46 15034.95,1373.46 15103.41,1305 15191.49,1305 15259.95,1373.46 P1.2@15372.45,1373.46 ; U2.17@14863,2235 14863,2134.45 15022.45,1975 U2.5@15092.45,1975 ; U2.5@15085.99,1975.55 15231.9,1975.55 15408.94,1798.5 C6.1@15582.45,1798.5
  Top Layer w25: C9_REG1.1@3208.32,551.5 3279.82,551.5 3308.32,580 3308.32,670 3408.32,770 3408.32,1176 3491.32,1259 3681.32,1259 ; C9_REG2.1@6531.03,551.5 6602.53,551.5 6631.03,580 6631.03,670 6731.03,770 6731.03,1176 6814.03,1259 7004.03,1259 ; C9_REG3.1@9853.74,551.5 9925.24,551.5 9953.74,580 9953.74,670 10053.74,770 10053.74,1176 10136.74,1259 10326.74,1259 ; C9_REG4.1@13176.45,551.5 13247.94,551.5 13276.45,580 13276.45,670 13376.45,770 13376.45,1176 13459.45,1259 13649.45,1259
  Top Layer w50: 3681.32,1259 3949.32,1527 3949.32,1749.32 4264,2064 4264,2494 3949.32,2808.68 3949.32,4259.32 4260,4570 4260,5047 3949.32,5357.68 v1(3949.32,5575) ; 7004.03,1259 7272.03,1527 v1(7272.03,5575) ; 10326.74,1259 10594.74,1527 v1(10594.74,5665) ; 13649.45,1259 13917.45,1527 13917.45,5515 14002.45,5600 14592.45,5600 14732.45,5460 U4.3@14732.45,5240 ; D16.1@14577.45,4685 14577.45,5055 14557.45,5075 14512.45,5075 14472.45,5115 C11.1@14472.45,5180 14523.55,5180 14573,5229.45 U4.3@14732.29,5229.45 ; D16.1@14582.45,4680 14582.45,4625 14627.45,4580 14947.45,4580 D12.2@15027.45,4500
  Bottom Layer w15: v1(14267.45,2990) 14327.45,3055 14712.45,3055 14762.45,3005 v1(14762.45,2990)
  Bottom Layer w50: 3949.32,5695 13917.45,5695
  other v1: 13917.45,5575 3949.32,5665 7272.03,5665 13917.45,5665
  other v2: 10594.72,5574.98
pads on no net: J1_BUS2.3 J1_BUS2.5 J1_BUS2.MH1 J1_BUS2.MH2 J1_BUS3.3 J1_BUS3.5 J1_BUS3.MH1 J1_BUS3.MH2 U2.15 U2.16 U2.19 U2.20 U2.21 U2.23 U2.24 U2.25 U2.26 U2.29 U2.34 U2.35 U2.36 U2.40 U2.41 U2.42 U2.43 U2.44

## Polygon pours and split planes (outlines as drawn)
GND on Top Layer "Top Layer-No Net" (solid, pour order 1000): 0,0 0,1019 13579.45,1019 13889.45,1329 13889.45,6377.67 cw(c13891.33,6377.67) 13890,6379 16507.06,6379 cw(c16507.06,6372.01) 16512,6376.95 16512,-1
EXTSUPP on Top Layer "Top Layer-No Net" (solid, pour order 1015): 14910.45,5670 14908.45,5670 14806.45,5772 15014.45,5772
VCC on Top Layer "Top Layer-No Net" (solid, pour order 1002): 13847.45,5720 13987.45,5720 13987.45,5550 13947.45,5510 13887.45,5510 13847.45,5550
VCC on Top Layer "Top Layer-No Net" (solid, pour order 1015): 13994.45,2295 13994.45,2293 13892.45,2191 13892.45,2399
VCC on Top Layer "Top Layer-No Net" (solid, pour order 1015): 13994.45,2510 13994.45,2508 13892.45,2406 13892.45,2614
VCC on Top Layer "Top Layer-No Net" (solid, pour order 1015): 13997.45,3295 13997.45,3293 13895.45,3191 13895.45,3399
A on Top Layer "Top Layer-No Net" (solid, pour order 1001): 15282.45,3205 15375.05,3297.6 15655.05,3297.6 15657.45,3300 15562.45,3205
B on Top Layer "Top Layer-No Net" (solid, pour order 1000): 15375.05,3372.4 15665.05,3372.4 15560.05,3477.4 15270.05,3477.4
EXTSUPP on Top Layer "Top Layer-No Net" (solid, pour order 1014): 13499.45,5512.91 13605.45,5618.91 13605.45,5406.91
EXTSUPP on Top Layer "Top Layer-No Net" (solid, pour order 1015): 13580.38,5669 13578.38,5669 13476.38,5771 13684.38,5771
EXTSUPP on Top Layer "Top Layer-No Net" (solid, pour order 1010): 13236.64,3826 13130.64,3720 13236.64,3720
EXTSUPP on Top Layer "Top Layer-No Net" (solid, pour order 1013): 13226.97,5406 13332.97,5512 13226.97,5512
EXTSUPP on Top Layer "Top Layer-No Net" (solid, pour order 1010): 13392.97,3538.9 13286.97,3644.9 13286.97,3538.9
EXTSUPP on Top Layer "Top Layer-No Net" (solid, pour order 1009): 13286.97,3456 13392.97,3562 13286.97,3562
EXTSUPP on Top Layer "Top Layer-No Net" (solid, pour order 1011): 11003.68,5666 10897.68,5772 11109.68,5772
EXTSUPP on Top Layer "Top Layer-No Net" (solid, pour order 1015): 11454.53,5669 11452.53,5669 11350.53,5771 11558.53,5771
EXTSUPP on Top Layer "Top Layer-No Net" (solid, pour order 1015): 8131.82,5669 8129.82,5669 8027.82,5771 8235.82,5771
EXTSUPP on Top Layer "Top Layer-No Net" (solid, pour order 1011): 7680.97,5666 7574.97,5772 7786.97,5772
EXTSUPP on Top Layer "Top Layer-No Net" (solid, pour order 1009): 9964.26,3456 10070.26,3562 9964.26,3562
EXTSUPP on Top Layer "Top Layer-No Net" (solid, pour order 1010): 10070.26,3538.9 9964.26,3644.9 9964.26,3538.9
EXTSUPP on Top Layer "Top Layer-No Net" (solid, pour order 1013): 9904.26,5406 10010.26,5512 9904.26,5512
EXTSUPP on Top Layer "Top Layer-No Net" (solid, pour order 1010): 9913.93,3826 9807.93,3720 9913.93,3720
EXTSUPP on Top Layer "Top Layer-No Net" (solid, pour order 1015): 10257.68,5669 10255.68,5669 10153.68,5771 10361.68,5771
EXTSUPP on Top Layer "Top Layer-No Net" (solid, pour order 1014): 10176.74,5512.91 10282.74,5618.91 10282.74,5406.91
VCC on Top Layer "Top Layer-No Net" (solid, pour order 1002): 10524.74,5720 10664.74,5720 10664.74,5550 10624.74,5510 10564.74,5510 10524.74,5550
EXTSUPP on Top Layer "Top Layer-No Net" (solid, pour order 1014): 6854.03,5512.91 6960.03,5618.91 6960.03,5406.91
EXTSUPP on Top Layer "Top Layer-No Net" (solid, pour order 1015): 6934.97,5669 6932.97,5669 6830.97,5771 7038.97,5771
EXTSUPP on Top Layer "Top Layer-No Net" (solid, pour order 1010): 6591.22,3826 6485.22,3720 6591.22,3720
EXTSUPP on Top Layer "Top Layer-No Net" (solid, pour order 1013): 6581.55,5406 6687.55,5512 6581.55,5512
EXTSUPP on Top Layer "Top Layer-No Net" (solid, pour order 1011): 4358.26,5666 4252.26,5772 4464.26,5772
EXTSUPP on Top Layer "Top Layer-No Net" (solid, pour order 1015): 4809.11,5669 4807.11,5669 4705.11,5771 4913.11,5771
EXTSUPP on Top Layer "Top Layer-No Net" (solid, pour order 1014): 3531.32,5512.91 3637.32,5618.91 3637.32,5406.91
EXTSUPP on Top Layer "Top Layer-No Net" (solid, pour order 1015): 3612.26,5669 3610.26,5669 3508.26,5771 3716.26,5771
EXTSUPP on Top Layer "Top Layer-No Net" (solid, pour order 1010): 3268.51,3826 3162.51,3720 3268.51,3720
EXTSUPP on Top Layer "Top Layer-No Net" (solid, pour order 1013): 3258.85,5406 3364.85,5512 3258.85,5512
EXTSUPP on Top Layer "Top Layer-No Net" (solid, pour order 1015): 1486.41,5669 1484.41,5669 1382.41,5771 1590.41,5771
VCC on Top Layer "Top Layer-No Net" (solid, pour order 1002): 3879.32,5720 4019.32,5720 4019.32,5550 3979.32,5510 3919.32,5510 3879.32,5550
VCC on Top Layer "Top Layer-No Net" (solid, pour order 1002): 7202.03,5720 7342.03,5720 7342.03,5550 7302.03,5510 7242.03,5510 7202.03,5550
EXTSUPP on Top Layer "Top Layer-No Net" (solid, pour order 1014): 3437.85,3549.3 3331.85,3443.3 3331.85,3655.3
EXTSUPP on Top Layer "Top Layer-No Net" (solid, pour order 1014): 6760.55,3549.3 6654.55,3443.3 6654.55,3655.3
EXTSUPP on Top Layer "Top Layer-No Net" (solid, pour order 1014): 10083.26,3549.3 9977.26,3443.3 9977.26,3655.3
EXTSUPP on Top Layer "Top Layer-No Net" (solid, pour order 1014): 13405.84,3549.3 13299.84,3443.3 13299.84,3655.3
GND on Bottom Layer "Top Layer-No Net" (solid, pour order 1001): 0,-1 0,6376.95 16511.89,6376.95 ccw(c16511.89,6377.11) 16512,6377 16512,2
VCC on Bottom Layer "Top Layer-No Net" (solid, pour order 1015): 13850.45,5615 13848.45,5615 13746.45,5717 13954.45,5717
VCC on Bottom Layer "Top Layer-No Net" (solid, pour order 1008): 13847.45,5720 13987.45,5720 13987.45,5550 13947.45,5510 13887.45,5510 13847.45,5550
VCC on Bottom Layer "Top Layer-No Net" (solid, pour order 1008): 10524.74,5720 10664.74,5720 10664.74,5550 10624.74,5510 10564.74,5510 10524.74,5550
VCC on Bottom Layer "Top Layer-No Net" (solid, pour order 1015): 7205.03,5615 7203.03,5615 7101.03,5717 7309.03,5717
VCC on Bottom Layer "Top Layer-No Net" (solid, pour order 1008): 7202.03,5720 7342.03,5720 7342.03,5550 7302.03,5510 7242.03,5510 7202.03,5550
VCC on Bottom Layer "Top Layer-No Net" (solid, pour order 1008): 3879.32,5720 4019.32,5720 4019.32,5550 3979.32,5510 3919.32,5510 3879.32,5550
VCC on Bottom Layer "Top Layer-No Net" (solid, pour order 1015): 10527.74,5615 10525.74,5615 10423.74,5717 10631.74,5717
VCC on Bottom Layer "Top Layer-No Net" (solid, pour order 1015): 10662.74,5615 10660.74,5615 10558.74,5717 10766.74,5717
VCC on Bottom Layer "Top Layer-No Net" (solid, pour order 1015): 7340.03,5615 7338.03,5615 7236.03,5717 7444.03,5717
VCC on Bottom Layer "Top Layer-No Net" (solid, pour order 1015): 4017.32,5615 4015.32,5615 3913.32,5717 4121.32,5717

## Keep-outs
Keep-Out Layer:
  the board outline again, w10

## Silkscreen, mask and mechanical layers (free items; w line width, h text height)
Top Overlay:
  lines w10: 14127.45,2210 14192.45,2210 ; 14127.45,2605 14192.45,2605 ; 14147.45,2180 14147.45,2245 ; 14147.45,2275 14147.45,2340 ; 14147.45,2370 14147.45,2435 ; 14147.45,2460 14147.45,2525 ; 14147.45,2555 14147.45,2620 ; 14157.45,4845 14222.45,4845 ; 14162.45,4375 14227.45,4375 ; 14182.45,4345 14182.45,4410 ; 14182.45,4440 14182.45,4505 ; 14182.45,4535 14182.45,4600 ; 14182.45,4625 14182.45,4690 ; 14182.45,4720 14182.45,4785 ; 14182.45,4810 14182.45,4875 ; 14215.48,2666.97 14215.48,2941.97 14417.77,2941.97 14417.77,2666.97 ; 14217.45,2210 14282.45,2210 ; 14217.45,2605 14282.45,2605 ; 14242.45,4845 14307.45,4845 ; 14252.45,4375 14317.45,4375 ; 14312.45,2210 14377.45,2210 ; 14312.45,2605 14377.45,2605 ; 14337.45,4845 14402.45,4845 ; 14347.45,4375 14412.45,4375 ; 14407.45,2210 14472.45,2210 ; 14407.45,2605 14472.45,2605 ; 14432.45,4845 14497.45,4845 ; 14437.45,2180 14437.45,2245 ; 14437.45,2275 14437.45,2340 ; 14437.45,2370 14437.45,2435 ; 14437.45,2460 14437.45,2525 ; 14437.45,2555 14437.45,2620 ; 14442.45,4375 14507.45,4375 ; 14472.45,4345 14472.45,4410 ; 14472.45,4440 14472.45,4505 ; 14472.45,4535 14472.45,4600 ; 14472.45,4625 14472.45,4690 ; 14472.45,4720 14472.45,4785 ; 14472.45,4810 14472.45,4875 ; 14613.77,2666.97 14613.77,2941.97 14805.48,2941.97 14805.48,2666.97 ; 15322.45,1210 15322.45,1045 15622.45,1045 15622.45,1210 ; 15322.45,1435 15322.45,1600 15622.45,1600 15622.45,1435 ; 15422.45,1045 15422.45,1210 ; 15427.45,1435 15427.45,1600 ; 15517.45,1045 15517.45,1210 ; 15522.45,1435 15522.45,1600
  text "GND" at 14212.45,4770 h60
  text "+5.0V" at 14327.45,4770 h60
  text "485 DI" at 14636.77,2683.92 h60
  text "485 RO" at 14230.48,2681.97 h60
  text "Keep Alive" at 14182.45,2535 h60 r270
  text "VTG" at 15387.45,1470.48 h60 r90
  text "GND" at 15584.45,1466.97 h60 r90
  text "MOSI" at 15485.95,1451 h60 r90
  text "MISO" at 15387.45,1082 h60 r90
  text "SCK" at 15485.95,1082 h60 r90
  text "RST" at 15584.45,1082 h60 r90
  text "ISP6PIN" at 15335.45,993 h60
  text "BANCO AZTECA" at 14564.93,850.03 h120
  text "BOARD:" at 14564.93,745.03 h120
  text "BAZ-NUMDISPLAY-01R03" at 14965.93,741.03 h120

## Dimensions
16512.45,6376.95 to 16512.45,0 on Mechanical 13
49,6356 to 16503,6354 on Mechanical 13

## Text inside footprints (layer, text, board x,y; h text height)
C10: Top Overlay "+" at 15127.45,5270 h98.43 r270
C11: Top Overlay "+" at 14327.45,5270 h98.43 r270
D13: Top Overlay "~" at 15282.45,4505 h60 r90; Top Overlay "~" at 15387.45,4505 h60 r90; Top Overlay "+" at 15282.45,4605 h60 r90; Top Overlay "-" at 15392.45,4610 h60 r90
P1: Top Overlay "6" at 15641.45,1359 h50; Top Overlay "5" at 15643.45,1258 h50; Top Overlay "1" at 15281.45,1256 h50; Top Overlay "2" at 15280.45,1367 h50